# EAGLE board dotclock-con-outer (EAGLE 7.2.0)
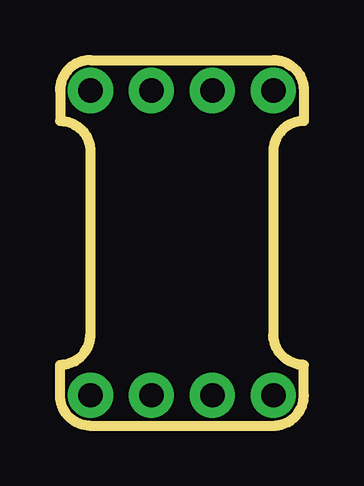
[diagram p0: board, top side]
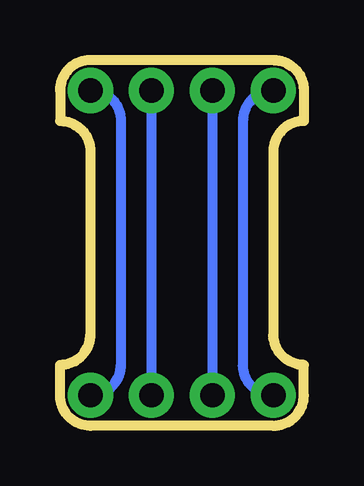
[diagram p1: board, bottom side, seen from below]

Size 10.16 x 15.24 mm. Coordinates in mm from the lower left corner, seen from the top.
Outline: 1.27,15.24 8.89,15.24 arc-90 10.16,13.97 10.16,12.7 arc90 8.89,11.43 8.89,3.81 arc90 10.16,2.54 10.16,1.27 arc-90 8.89,0 1.27,0 arc-90 0,1.27 0,2.54 arc90 1.27,3.81 1.27,11.43 arc90 0,12.7 0,13.97 arc-90 1.27,15.24
Copper layers (1*16): Top 0.035mm / dielectric 1.5mm / Bottom 0.035mm
Design rules "default": minimum track width 10mil, minimum drill 24mil, track to track 8mil, track to pad 8mil, pad to pad 8mil, via to via 8mil, smd to smd 8mil, copper to edge 40mil, drill to drill 8mil, minimum pad ring 10mil, minimum via ring 8mil, stop-mask expansion 4mil, vias tented up to drill 0mil, thermal gap 10mil

## Footprints (pad centres in the part's own frame; a part is rotated, then mirrored left to right if it is on the bottom)
1X04_NO_SILK_ALL_ROUND = drill 1.016 pad 1.88: 1 0,0; 2 2.54,0; 3 5.08,0; 4 7.62,0

## Placement (x,y rotation side)
JP1  [1X04_NO_SILK_ALL_ROUND]  1.27,13.97 0 top
JP4  [1X04_NO_SILK_ALL_ROUND]  1.27,1.27 0 top

## Library data of the parts
JP1 JP4 = SparkFun-Connectors

## Nets
N$1: JP1.1 JP4.1
N$2: JP1.2 JP4.2
N$3: JP1.3 JP4.3
N$4: JP1.4 JP4.4

## Tracks (layer width: path | path; a pad name or v marks a point on that pad's centre or on a via)
N$1
  Bottom 0.406: JP1.1 arc-90 2.54,12.7 2.54,2.54 arc-90 JP4.1
N$2
  Bottom 0.406: JP1.2 JP4.2
N$3
  Bottom 0.406: JP1.3 JP4.3
N$4
  Bottom 0.406: JP4.4 arc-90 7.62,2.54 7.62,12.7 arc-90 JP1.4